# Altium PCB Venato_PCB_v1.PcbDoc (part 1 of 2)
Units mm, origin at the board's own origin, x right, y up, seen from the top; angles counter-clockwise.
Board outline 80 x 50 mm, 2 copper layers (Top Layer, Bottom Layer); 79 components, 70 nets, 349 pads, 0 vias.
Unrouted connection lines stored in the file: 190.
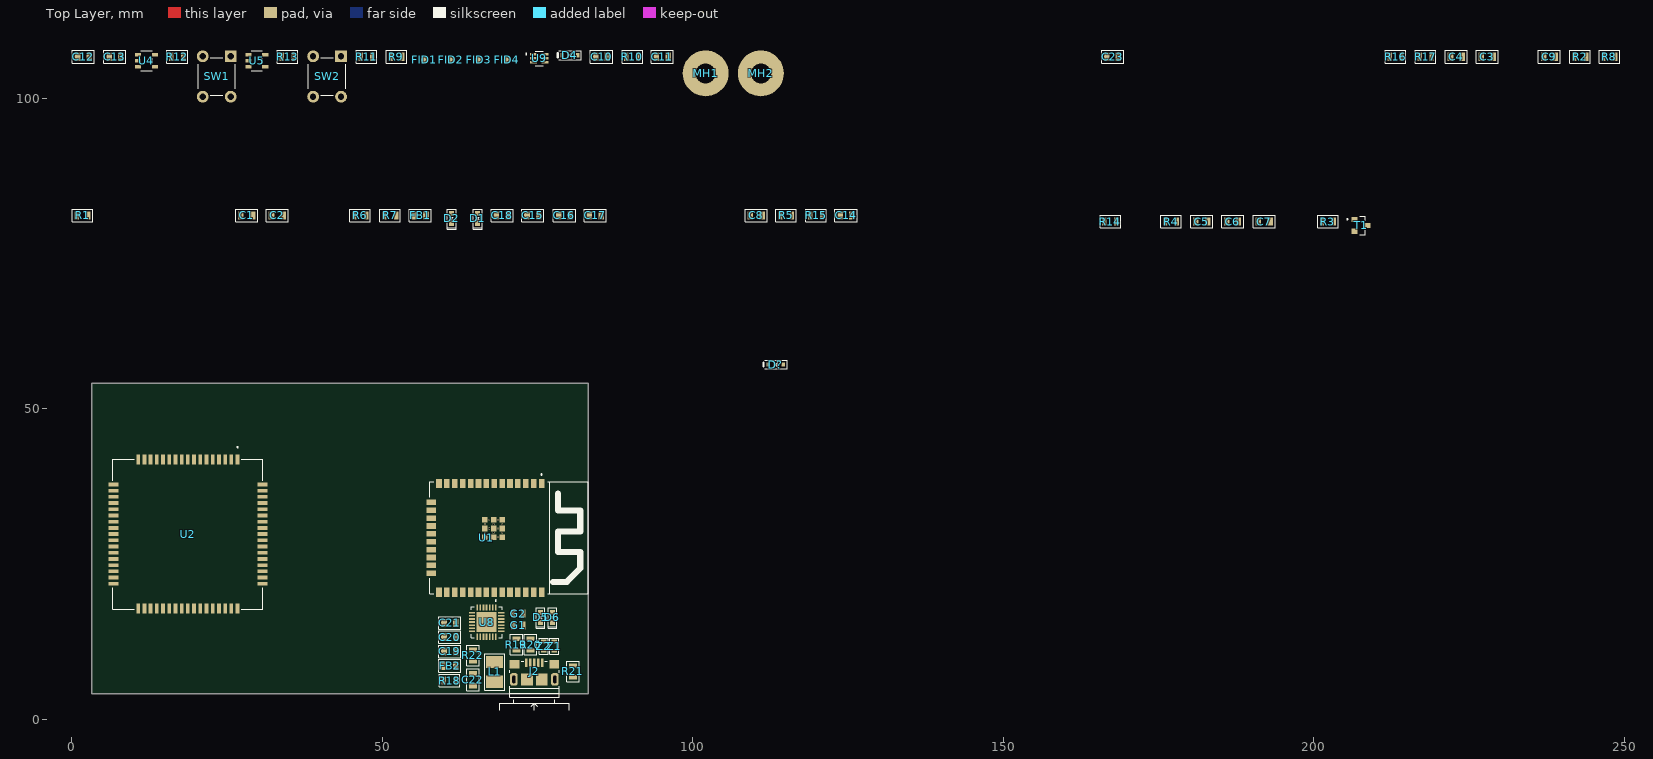
[diagram p0: Top Layer view]
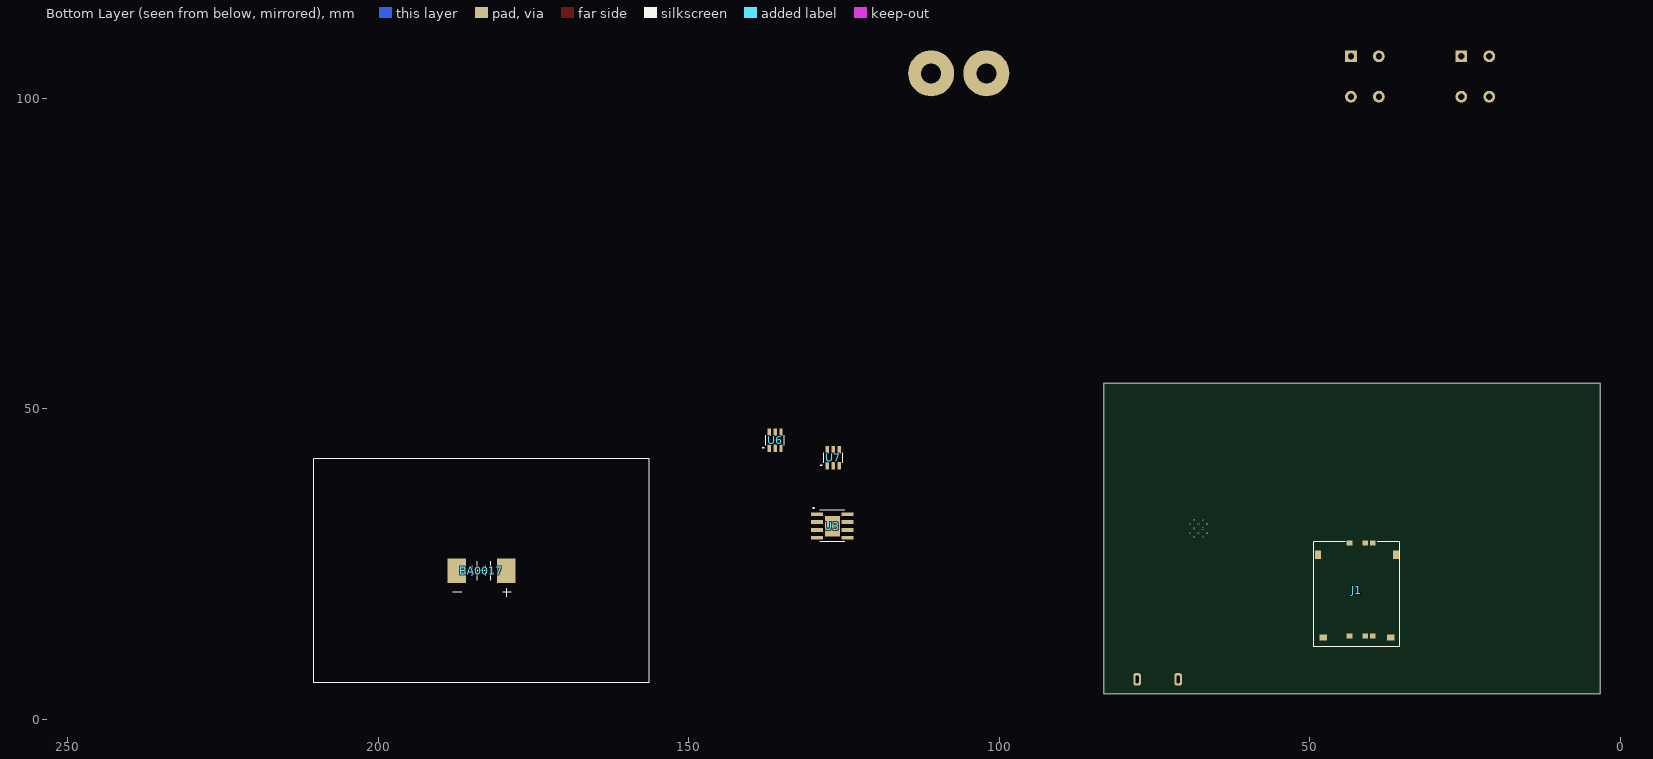
[diagram p1: Bottom Layer view, seen from below]

## Layer stack, top to bottom
Top Solder: solder mask 0.0102, Solder Resist, Dk 3.5
Top Layer: signal copper 0.0356
Dielectric 1: dielectric 0.32, FR-4, Dk 4.8
Bottom Layer: signal copper 0.0356
Bottom Solder: solder mask 0.0102, Solder Resist, Dk 3.5

## Board outline
3.2,4.1 83.2,4.1 83.2,54.1 3.2,54.1

## Design rules (kind name [scope] priority, off if disabled: settings)
Clearance [All] p1: gap=0.254 ignorepadtopadclearanceinfootprint=FALSE except(0: Arc-Hole Track-Hole SMDPad-Hole THPad-Hole Via-Hole Fill-Hole Poly-Hole Region-Hole Text-Hole)
PolygonConnect [All] p1: connectstyle=Relief reliefconductorwidth=0.254 reliefentries=4 polygonreliefangle="90 Angle" airgapwidth=0.254
RoutingVias [All] p1: holewidth=0.711 width=1.27 viastyle="Through Hole" minholewidth=0.711 minwidth=1.27 maxholewidth=0.711 maxwidth=1.27
SolderMaskExpansion [All] p1: expansion=0.102 istentingtop=FALSE
Width [All] p1: maxlimit=0.254 minlimit=0.254 preferedwidth=0.254
30 further rules are at their usual default settings.

## Components (designator, comment, footprint, x,y, rotation, side; value= is the part's Value field where it differs from the comment)
BA0017 "BAT?" Battery 183.4,23.9 r0 bottom
C1 "22uF" C0805 28.167,81.137 r0 top
C2 "100nF" C0805 33.12,81.137 r0 top
C3 "100nF" C0805 227.938,106.668 r0 top
C4 "100nF" C0805 222.985,106.668 r0 top
C5 "100nF" C0805 181.983,80.137 r0 top
C6 "1uF" C0805 186.936,80.137 r0 top
C7 "100uF" C0805 192.016,80.137 r0 top
C8 "1uF" C0805 110.209,81.137 r0 top
C9 "10uF" C0805 237.971,106.668 r0 top
C10 "100nF" C0805 85.317,106.668 r0 top
C11 "100nF" C0805 95.096,106.668 r0 top
C12 "1uF" C0805 1.878,106.668 r0 top
C13 "1uF" C0805 6.958,106.668 r0 top
C14 "100nF" C0805 124.687,81.137 r0 top
C15 "33pF" C0805 74.268,81.137 r0 top
C16 "33pF" C0805 79.348,81.137 r0 top
C17 "33pF" C0805 84.301,81.137 r0 top
C18 "100nF" C0805 69.315,81.137 r0 top
C19 "10uF" C0805 60.9,10.9 r0 top
C20 "100nF" C0805 60.9,13.2 r0 top
C21 "100nF" C0805 60.9,15.5 r0 top
C22 "100uF" C0805 64.6,6.35 r270 top
C23 "100uF" C0805 167.613,106.668 r0 top
D1 "Green" LED0603 65.378,80.629 r90 top
D2 "Orange" LED0603 61.187,80.629 r90 top
D4 "BAT54HT1G" SOD323 80.237,106.922 r0 top
D5 "Orange" LED0603 75.5,16.4 r90 top
D6 "Orange" LED0603 77.4,16.4 r90 top
D? "5.1V" SOD323 113.4,57.1 r0 top
FB1 "MPZ2012S601AT000" C0805 56.107,81.137 r0 top
FB2 "MPZ2012S601AT000" C0805 60.9,8.6 r0 top
FID1 "FID_1MM" FID_x_420 56.742,106.16 r0 top
FID2 "FID_1MM" FID_x_420 61.06,106.16 r0 top
FID3 "FID_1MM" FID_x_420 65.505,106.16 r0 top
FID4 "FID_1MM" FID_x_420 70.077,106.16 r0 top
G1 "0" R0805_no_3d 71.9,15.1 r180 top
G2 "0" R0805_no_3d 71.9,17 r180 top
J1 "78800-0001" SIM 42.4,20.1 r90 bottom
J2 "10118193-0001LF" 10118193-0001LF 74.5,7.738 r0 top
L1 "2U2/2A" CL_inductor 68.1,7.6 r90 top
MH1 "Mounting_hole_17.4_3.2" MH_17.4_3.2 102.081,104.001 r0 top
MH2 "Mounting_hole_17.4_3.2" MH_17.4_3.2 110.971,104.001 r0 top
R1 "10K" R0805 1.751,81.137 r0 top
R2 "10K" R0805 242.924,106.668 r0 top
R3 "4.7K" R0805 202.303,80.137 r0 top
R4 "47K" R0805 177.03,80.137 r0 top
R5 "10K" R0805 115.035,81.137 r0 top
R6 "680" R0805 46.455,81.137 r0 top
R7 "680" R0805 51.281,81.137 r0 top
R8 "1.2k" R0805 247.623,106.668 r0 top
R9 "1K" R0805 52.297,106.668 r0 top
R10 "1K" R0805 90.27,106.668 r0 top
R11 "560" R0805 47.471,106.668 r0 top
R12 "10K" R0805 16.991,106.668 r0 top
R13 "10K" R0805 34.771,106.668 r0 top
R14 "100" R0805 167.251,80.137 r0 top
R15 "1K" R0805 119.861,81.137 r0 top
R16 "560" R0805 213.206,106.668 r0 top
R17 "560" R0805 218.032,106.668 r0 top
R18 "10K" R0805 60.85,6.2 r180 top
R19 "22" R0805 71.6,12 r90 top
R20 "22" R0805 73.9,12 r90 top
R21 "0R" R0805 80.7,7.7 r90 top
R22 "10K" R0805 64.6,10.25 r90 top
SW1 "1825910-6" DIP41825910-6 23.341,103.493 r0 top
SW2 "1825910-6" DIP41825910-6 41.121,103.493 r0 top
T1 "2N7002" TRANS_MMBT2907A 207.637,79.502 r0 top
U1 "ESP32-WROOM-32E-N8" XCVR_ESP32-WROOM-32E_(16MB) 70.4,29.2 r270 top
U2 "SIM808" XCVR_SIM808 18.7,29.8 r270 top
U3 "TP4056" SOP_8 126.9,31.1 r180 bottom
U4 "SN74AHC1G09DBVR" DBV_SOT_5 12.038,106.033 r0 top
U5 "SN74AHC1G09DBVR" DBV_SOT_5 29.818,106.033 r0 top
U6 "DW01A" SOT23-6 136.1,44.9 r180 bottom
U7 "FS8205A" SOT23-6 126.75,42.1 r180 bottom
U8 "CP2102N-A02-GQFN28R" WFQFN-28 66.8,15.64 r270 top
U9 "UMH3NTN" SOT-363 75.284,106.414 r0 top
Z1 "CG0603MLC-05E" R0603 77.7,11.75 r270 top
Z2 "CG0603MLC-05E" R0603 76,11.75 r270 top

## Footprints (in the part's own frame and the unit in brackets; to place one, negate y for a bottom-side part, rotate by r counter-clockwise, add the part's x,y. Pads: shape width x height; smd on the part's side, far side on the other; paste and mask are expansions set on the pad)
10118193-0001LF [mm]
  rect 0.4x1.35 smd mask+0.05: 1(-1.3,1.338) 2(-0.65,1.338) 3(0,1.338) 4(0.65,1.338) 5(1.3,1.338)
  rect 1.6x1.4 smd: 6(-3.2,1.112) 7(3.2,1.112)
  rrect60% 1.2x2 hole 0.5 slot 1.2 at 90 deg mask+0.05: 8(-3.3,-1.338) 9(3.3,-1.338)
  rect 1.9x1.9 smd: 10(-1.2,-1.338) 11(1.2,-1.338)
  silkscreen extent -5.6,-6.3 5.6,1.6, body extent -3.93,-4.2 3.93,1.58, height 2.88
Battery [mm]
  rect 3x4 smd: 1(-4,0) 2(4,0)
  silkscreen extent -27,-18 27,18, body extent -26.6,-29.21 26.5,17.61, height 5.46
C0805 [mm]
  rect 0.9x1.3 smd: 1(-0.95,0) 2(0.95,0)
  silkscreen extent -1.78,-1.02 1.78,1.02, body extent -1.15,-0.51 1.15,0.49, height 1.53
CL_inductor [mm]
  rect 2x2.7 smd: 1(-1.6,0) 2(1.6,0)
  silkscreen extent -2.95,-1.6 2.9,1.6, body extent -1.7,-1.25 1.7,1.25, height 2.7
DBV_SOT_5 [mm]
  rect 1x0.55 smd: 1(-1.35,0.95) 2(-1.35,0) 3(-1.35,-0.95) 4(1.35,-0.95) 5(1.35,0.95)
  silkscreen extent -0.9,-1.6 0.9,1.6, body extent -1.53,-1.53 1.5,1.53, height 1.6
DIP41825910-6 [mm]
  rect 1.9x1.9 hole 1: 1(2.25,3.25)
  round 1.9 hole 1: 2(2.25,-3.25) 3(-2.25,3.25) 4(-2.25,-3.25)
  silkscreen extent -3,-3 3,3, body extent -3,-3.9 3,3.9, height 5
FID_x_420 [mil]
  round 40 smd paste-40 mask+40: 1(0,0)
LED0603 [mm]
  rect 0.8x0.8 smd: 1(-0.8,0) 2(0.8,0)
  silkscreen extent -1.75,-0.7 1.5,0.7, body extent -0.85,-0.4 0.85,0.4, height 0.65
MH_17.4_3.2 [mm]
  round 7.4 hole 3.2: 1(0,0)
R0603 [mm]
  rect 0.6x0.9 smd: 1(-0.75,0) 2(0.75,0)
  silkscreen extent -1.3,-0.7 1.3,0.7, body extent -0.79,-0.42 0.81,0.42, height 0.81
R0805 [mm]
  rect 0.7x1.3 smd: 1(-0.95,0) 2(0.95,0)
  silkscreen extent -1.65,-1.02 1.65,1.02, body extent -1,-0.6 1,0.6, height 0.7
R0805_no_3d [mm]
  rect 0.7x1.3 smd: 1(-0.8,0) 2(0.8,0)
SIM [mm]
  rect 0.8x0.9 smd: 1(-6.71,-2.57) 2(-6.71,-1.33) 3(-6.71,1.21) 5(8.23,-2.57) 6(8.23,-1.33) 7(8.23,1.21)
  rect 0.95x1.2 smd: P1(-6.94,5.425) P2(-6.94,-5.425)
  rect 1.4x0.95 smd: P3(6.37,-6.26) P4(6.37,6.26)
  silkscreen extent -8.48,-6.93 8.48,6.93, body extent -8.38,-6.93 8.58,6.93, height 1.3
SOD323 [mil]
  rect 22x27 smd: 1(-48,0) 2(48,0)
  silkscreen extent -79,-28 71,28, body extent -49,-25 49,25, height 35
SOP_8 [mm]
  rect 1.97x0.6 smd: 1(-2.475,1.905) 2(-2.475,0.635) 3(-2.475,-0.635) 4(-2.475,-1.905) 5(2.475,-1.905) 6(2.475,-0.635) 7(2.475,0.635) 8(2.475,1.905)
  rect 2.413x3.302 smd paste-3: 9(0,0)
  silkscreen extent -3.1,-2.55 2,3, body extent -3.11,-2.5 3.11,2.5, height 1.87
SOT23-6 [mm]
  rect 0.55x1.2 smd: 1(-0.95,-1.3) 2(0,-1.3) 3(0.95,-1.3) 4(0.95,1.3) 5(0,1.3) 6(-0.95,1.3)
  silkscreen extent -2,-1.3 1.5,0.82, body extent -1.45,-1.4 1.45,1.4, height 1.45
SOT-363 [mm]
  rect 1.09x0.4 smd: 1(-0.92,0.65) 2(-0.92,0) 3(-0.92,-0.65) 4(0.92,-0.65) 5(0.92,0) 6(0.92,0.65)
  silkscreen extent -2.2,-1.17 0.68,1.17, body extent -1.05,-1 1.05,1, height 1
TRANS_MMBT2907A [mm]
  rect 1x0.85 smd: 1(-1.05,0.95) 2(-1.05,-0.95) 3(1.05,0)
  silkscreen extent -2.3,-1.46 0.65,1.46, body extent -1.25,-1.05 0.85,1.05
WFQFN-28 [mm]
  rect 0.99x0.27 smd: 1(-2.36,1.5) 2(-2.36,1) 3(-2.36,0.5) 4(-2.36,0) 5(-2.36,-0.5) 6(-2.36,-1) 7(-2.36,-1.5) 15(2.36,-1.5) 16(2.36,-1) 17(2.36,-0.5) 18(2.36,0) 19(2.36,0.5) 20(2.36,1) 21(2.36,1.5)
  rect 0.27x0.99 smd: 8(-1.5,-2.36) 9(-1,-2.36) 10(-0.5,-2.36) 11(0,-2.36) 12(0.5,-2.36) 13(1,-2.36) 14(1.5,-2.36) 22(1.5,2.36) 23(1,2.36) 24(0.5,2.36) 25(0,2.36) 26(-0.5,2.36) 27(-1,2.36) 28(-1.5,2.36)
  rect 3.25x3.25 smd paste-0.597: 29(0,0)
  silkscreen extent -3.55,-2.5 2.5,2.5, body extent -2.51,-2.51 2.51,2.51, height 0.75
XCVR_ESP32-WROOM-32E_(16MB) [mm]
  rect 1.5x0.9 smd: 1(-8.75,5.26) 2(-8.75,3.99) 3(-8.75,2.72) 4(-8.75,1.45) 5(-8.75,0.18) 6(-8.75,-1.09) 7(-8.75,-2.36) 8(-8.75,-3.63) 9(-8.75,-4.9) 10(-8.75,-6.17) 11(-8.75,-7.44) 12(-8.75,-8.71) 13(-8.75,-9.98) 14(-8.75,-11.25) 25(8.75,-11.25) 26(8.75,-9.98) 27(8.75,-8.71) 28(8.75,-7.44) 29(8.75,-6.17) 30(8.75,-4.9) 31(8.75,-3.63) 32(8.75,-2.36) 33(8.75,-1.09) 34(8.75,0.18) 35(8.75,1.45) 36(8.75,2.72) 37(8.75,3.99) 38(8.75,5.26)
  rect 0.9x1.5 smd: 15(-5.715,-12.5) 16(-4.445,-12.5) 17(-3.175,-12.5) 18(-1.905,-12.5) 19(-0.635,-12.5) 20(0.635,-12.5) 21(1.905,-12.5) 22(3.175,-12.5) 23(4.445,-12.5) 24(5.715,-12.5)
  rect 0.9x0.9 smd: 39_1(-2.9,-1.06) 39_2(-1.5,-1.06) 39_3(-0.1,-1.06) 39_4(-2.9,-2.46) 39_5(-1.5,-2.46) 39_6(-0.1,-2.46) 39_7(-2.9,-3.86) 39_8(-1.5,-3.86) 39_9(-0.1,-3.86)
  round 0.3 hole 0.2 mask+0: 39_10(-2.2,-1.06) 39_11(-0.8,-1.06) 39_12(-2.9,-1.76) 39_13(-1.5,-1.76) 39_14(-0.1,-1.76) 39_15(-2.2,-2.46) 39_16(-0.8,-2.46) 39_17(-2.9,-3.16) 39_18(-1.5,-3.16) 39_19(-0.1,-3.16) 39_20(-2.2,-3.86) 39_21(-0.8,-3.86)
  silkscreen extent -10.3,-12.75 9,12.75, body extent -9,-12.75 9,12.75, height 3.25
XCVR_SIM808 [mm]
  rect 1.6x0.6 smd: 1(-12,8) 2(-12,7) 3(-12,6) 4(-12,5) 5(-12,4) 6(-12,3) 7(-12,2) 8(-12,1) 9(-12,0) 10(-12,-1) 11(-12,-2) 12(-12,-3) 13(-12,-4) 14(-12,-5) 15(-12,-6) 16(-12,-7) 17(-12,-8) 35(12,-8) 36(12,-7) 37(12,-6) 38(12,-5) 39(12,-4) 40(12,-3) 41(12,-2) 42(12,-1) 43(12,0) 44(12,1) 45(12,2) 46(12,3) 47(12,4) 48(12,5) 49(12,6) 50(12,7) 51(12,8)
  rect 0.6x1.6 smd: 18(-8,-12) 19(-7,-12) 20(-6,-12) 21(-5,-12) 22(-4,-12) 23(-3,-12) 24(-2,-12) 25(-1,-12) 26(0,-12) 27(1,-12) 28(2,-12) 29(3,-12) 30(4,-12) 31(5,-12) 32(6,-12) 33(7,-12) 34(8,-12) 52(8,12) 53(7,12) 54(6,12) 55(5,12) 56(4,12) 57(3,12) 58(2,12) 59(1,12) 60(0,12) 61(-1,12) 62(-2,12) 63(-3,12) 64(-4,12) 65(-5,12) 66(-6,12) 67(-7,12) 68(-8,12)
  silkscreen extent -14.1,-12.07 12.07,12.07, body extent -12,-12 12,12, height 2.8

## Part data
BA0017: library part BA0017, "3.7V 1200mAh Lipo Battery. Dimension: 40.0±3.0mm x 30.0±2.0mm 8.0±0.5mm (1.575±0.118\" x 1.181±0.079\" x 0.315±0.020\")"
C1: library part CL21A226MAQNNNE, "CAP CER 22UF 25V X5R 0805", Case Code (Imperial)=0805, Case Code (Metric)=2012, Dielectric=X5R, Manufacturer=Samsung, Max Operating Temperature=85°C, Min Operating Temperature=-55°C, Package Quantity=1, Supplier Part Number 1=C45783, Tolerance=20%, Voltage Rating=25V, Capacitance=22uF, Case/Package=0805, Category="Ceramic Capacitors", ComponentLink1Description=https://datasheet.ciiva.com/25724/cl21a226maqnnne-25724468.pdf?src-supplier=Digi-Key, ComponentLink1URL=https://datasheet.ciiva.com/25724/cl21a226maqnnne-25724468.pdf?src-supplier=Digi-Key, Construction=Flat, Contact Plating=Tin, Depth=1.25mm, Length=2mm, Manufacturer Part Number=CL21A226MAQNNNE, Mount="Surface Mount", Packaging="Tape and Reel", Pricing 1="20=0.02360, 200=0.01840, 600=0.01610, 2000=0.01440, 10000=0.01370, 20000=0.01320 (USD)", RoHS=Yes, RoHS Compliant=Yes, Series=CL, Stock 1=1815620, Supplier 1=LCSC, Termination=Wraparound, Thickness=0.055inch, Width=0.049inch
C2 C3 C4 C5 C10 C11 C14 C18 C20 C21: library part CGA4J2X7R1H104K125AM, "Cap Ceramic 0.1uF 50V X7R 10% Pad SMD 0805 125°C Automotive T/R", Case Code (Imperial)=0805, Case Code (Metric)=2012, Dielectric=X7R, Manufacturer=TDK, Max Operating Temperature=125°C, Min Operating Temperature=-55°C, Package Quantity=1, Ratings=AEC-Q200, Resistor Type=Ceramic, Supplier Part Number 1=445-6958-1-ND, Tolerance=10%, Voltage Rating=50V, Capacitance=100nF, Case/Package=0805, Category="Ceramic Capacitors", ComponentLink1Description=http://components.arrow.com/part/dataview/0323_06888403?src-supplier=Arrow+Europe, ComponentLink1URL=http://components.arrow.com/part/dataview/0323_06888403?src-supplier=Arrow+Europe, ComponentLink2Description=https://product.tdk.com/info/en/catalog/datasheets/mlcc_automotive_openmode_en.pdf?src-supplier=Digi-Key, ComponentLink2URL=https://product.tdk.com/info/en/catalog/datasheets/mlcc_automotive_openmode_en.pdf?src-supplier=Digi-Key, ComponentLink3Description=https://product.tdk.com/info/en/documents/chara_sheet/CGA4J2X7R1H104K125AM.pdf?src-supplier=Digi-Key, ComponentLink3URL=https://product.tdk.com/info/en/documents/chara_sheet/CGA4J2X7R1H104K125AM.pdf?src-supplier=Digi-Key, ComponentLink4Description=http://components.arrow.com/part/dataview/57437351S460182N1165?src-supplier=Arrow+Electronics, ComponentLink4URL=http://components.arrow.com/part/dataview/57437351S460182N1165?src-supplier=Arrow+Electronics, Depth=1.25mm, Features="Soft Termination", Height=1.25mm, Length=0.079inch, Manufacturer Part Number=CGA4J2X7R1H104K125AM, Mount="Surface Mount", Packaging="Tape and Reel", Pricing 1="1=0.20000, 10=0.14200, 50=0.08080, 100=0.06700, 500=0.04696, 1000=0.03888 (USD)", RoHS=Yes, RoHS Compliant=Yes, Series=CGA, Stock 1=4940, Supplier 1=Digi-Key, Termination=SMD/SMT, Thickness=0.057inch, Voltage Rating (DC)=50V, Weight=0.000194oz, Width=0.049inch
C6: library part GRM21BR71H105KA12L, "0805 1 uF 50 V ±10% Tolerance X7R Multilayer Ceramic Chip Capacitor", Case Code (Imperial)=0805, Case Code (Metric)=2012, Dielectric=X7R, Manufacturer=Murata, Max Operating Temperature=125°C, Min Operating Temperature=-55°C, Package Quantity=1, Tolerance=10%, Voltage=50V, Capacitance=1uF, Case/Package=0805, Category="Ceramic Capacitors", ComponentLink1Description=https://datasheet.ciiva.com/22774/1747475-22774409.pdf?src-supplier=Farnell, ComponentLink1URL=https://datasheet.ciiva.com/22774/1747475-22774409.pdf?src-supplier=Farnell, ComponentLink2Description=https://datasheet.ciiva.com/28659/1684872-28659460.pdf?src-supplier=Element14, ComponentLink2URL=https://datasheet.ciiva.com/28659/1684872-28659460.pdf?src-supplier=Element14, ComponentLink3Description=https://datasheet.ciiva.com/139/grm21br71h105ka12-139467.pdf?src-supplier=Digi-Key, ComponentLink3URL=https://datasheet.ciiva.com/139/grm21br71h105ka12-139467.pdf?src-supplier=Digi-Key, ComponentLink4Description=https://datasheet.ciiva.com/3777/8166grm21br71h105ka1223-3777308.pdf?src-supplier=Arrow+Electronics, ComponentLink4URL=https://datasheet.ciiva.com/3777/8166grm21br71h105ka1223-3777308.pdf?src-supplier=Arrow+Electronics, ComponentLink5Description=https://datasheet.ciiva.com/29202/450841-da-01-de-vs-chip-kond-0805-1-0-uf-10pr-50-0v-x7r-29202833.pdf?src-supplier=Conrad, ComponentLink5URL=https://datasheet.ciiva.com/29202/450841-da-01-de-vs-chip-kond-0805-1-0-uf-10pr-50-0v-x7r-29202833.pdf?src-supplier=Conrad, ComponentLink6Description=https://datasheet.ciiva.com/29199/454791-da-01-en-vs-kondensator-0805-29199539.pdf?src-supplier=Conrad, ComponentLink6URL=https://datasheet.ciiva.com/29199/454791-da-01-en-vs-kondensator-0805-29199539.pdf?src-supplier=Conrad, ComponentLink7Description=https://datasheet.ciiva.com/22774/608985-22774412.pdf?src-supplier=Farnell, ComponentLink7URL=https://datasheet.ciiva.com/22774/608985-22774412.pdf?src-supplier=Farnell, ComponentLink8Description=https://datasheet.ciiva.com/22774/608985-22774411.pdf?src-supplier=Farnell, ComponentLink8URL=https://datasheet.ciiva.com/22774/608985-22774411.pdf?src-supplier=Farnell, ComponentLink9Description=https://datasheet.ciiva.com/16199/product-16199127.pdf?src-supplier=Future+Electronics, ComponentLink9URL=https://datasheet.ciiva.com/16199/product-16199127.pdf?src-supplier=Future+Electronics, Construction=Flat, Depth=1.25mm, Height=1.25mm, Lead Free="Lead Free", Length=2mm, Manufacturer Part Number=GRM21BR71H105KA12L, Material=Ceramic, Mount="Surface Mount", Number of Pins=2, Packaging="Tape and Reel", Pricing 1="1=0.72300, 25=0.64900, 50=0.59100, 100=0.52300, 250=0.46500, 500=0.39900, 1000=0.35100, 2500=0.27800, 3000=0.27800 (USD)", Radiation Hardening=No, Reach SVHC Compliant=Yes, RoHS=Yes, RoHS Compliant=Yes, Series=GRM, Supplier 1=Newark, Termination=SMD/SMT, Thickness=0.053inch, Voltage Rating=50V, Voltage Rating (DC)=50V, Width=0.049inch
C7 C22 C23: library part GRM21BR60J107ME15L, "0805 100 uF 6.3 V ±20% Tolerance X5R Multilayer Ceramic Chip Capacitor", Case Code (Imperial)=0805, Case Code (Metric)=2012, Dielectric=X5R, Manufacturer=Murata, Max Operating Temperature=85°C, Min Operating Temperature=-55°C, Supplier Part Number 1=490-13981-1-ND, Tolerance=20%, Voltage Rating=6.3V, Capacitance=100uF, Case/Package=0805, Category="Ceramic Capacitors", ComponentLink1Description=http://www.farnell.com/datasheets/1957830.pdf?src-supplier=Farnell, ComponentLink1URL=http://www.farnell.com/datasheets/1957830.pdf?src-supplier=Farnell, ComponentLink2Description=http://www.farnell.com/datasheets/1957830.pdf?src-supplier=Element14, ComponentLink2URL=http://www.farnell.com/datasheets/1957830.pdf?src-supplier=Element14, ComponentLink3Description=https://search.murata.co.jp/Ceramy/image/img/A01X/G101/ENG/GRM21BR60J107ME15-01.pdf?src-supplier=Digi-Key, ComponentLink3URL=https://search.murata.co.jp/Ceramy/image/img/A01X/G101/ENG/GRM21BR60J107ME15-01.pdf?src-supplier=Digi-Key, ComponentLink4Description=http://www.farnell.com/datasheets/1957830.pdf?src-supplier=Newark, ComponentLink4URL=http://www.farnell.com/datasheets/1957830.pdf?src-supplier=Newark, Lead Free="Lead Free", Length=0.079inch, Manufacturer Part Number=GRM21BR60J107ME15L, Mount="Surface Mount", Packaging="Cut Tape", Pricing 1="1=1.15000, 10=0.90900, 50=0.78800, 100=0.68180, 500=0.51516, 1000=0.45456 (USD)", Reach SVHC Compliant=Yes, RoHS=Yes, RoHS Compliant=Yes, Series=GRM, Stock 1=830718, Supplier 1=Digi-Key, Thickness=0.057inch, Voltage Rating (DC)=6.3V, Width=0.049inch
C8 C12 C13: library part C2012X5R1E105K125AA, "TDK - C2012X5R1E105K125AA - SMD Multilayer Ceramic Capacitor, 1 µF, 25 V, 0805 [2012 Metric], ± 10%, X5R, C Series", Case Code (Imperial)=0805, Case Code (Metric)=2012, Dielectric=X5R, Dielectric Material=Ceramic, Manufacturer=TDK, Max Operating Temperature=85°C, Min Operating Temperature=-55°C, Package Quantity=2000, Supplier Part Number 1=445-1419-1-ND, Tolerance=10%, Voltage=25V, Capacitance=1uF, Case/Package=0805, Category="Ceramic Capacitors", ComponentLink1Description=https://datasheet.ciiva.com/11787/0900766b80c1bb00-11787608.pdf?src-supplier=RSComponents, ComponentLink1URL=https://datasheet.ciiva.com/11787/0900766b80c1bb00-11787608.pdf?src-supplier=RSComponents, ComponentLink2Description=https://datasheet.ciiva.com/16449/e412-c-16449595.pdf?src-supplier=Future+Electronics, ComponentLink2URL=https://datasheet.ciiva.com/16449/e412-c-16449595.pdf?src-supplier=Future+Electronics, ComponentLink3Description=https://datasheet.ciiva.com/28602/1744655-28602171.pdf?src-supplier=Element14, ComponentLink3URL=https://datasheet.ciiva.com/28602/1744655-28602171.pdf?src-supplier=Element14, ComponentLink4Description=https://datasheet.ciiva.com/15192/getdatasheetpartid-726707-15192140.pdf?src-supplier=Verical, ComponentLink4URL=https://datasheet.ciiva.com/15192/getdatasheetpartid-726707-15192140.pdf?src-supplier=Verical, Construction=Flat, Depth=1.25mm, Height=1.25mm, Lead Free="Lead Free", Length=2mm, Manufacturer Part Number=C2012X5R1E105K125AA, Mount="Surface Mount", Number of Pins=2, Packaging="Tape and Reel", Pricing 1="1=0.23000, 10=0.15800, 50=0.09500, 100=0.08030, 500=0.05492, 1000=0.04858 (USD)", Radiation Hardening=No, REACH SVHC="No SVHC", Resistor Type=Ceramic, RoHS=Yes, RoHS Compliant=Yes, Series=C, Stock 1=32247, Supplier 1=Digi-Key, Termination=SMD/SMT, Thickness=0.057inch, Voltage Rating=25V, Voltage Rating (DC)=25V, Weight=0.000194oz, Width=0.049inch
C9 C19: library part CGA4J3X7S1A106M125AB, "Cap Ceramic 10uF 10V X7S 20% Pad SMD 0805 125°C Low ESR Automotive T/R", Case Code (Imperial)=0805, Case Code (Metric)=2012, Dielectric=X7S, Manufacturer=TDK, Max Operating Temperature=125°C, Min Operating Temperature=-55°C, Package Quantity=2000, Ratings=AEC-Q200, Supplier Part Number 1=445-16115-1-ND, Tolerance=20%, Voltage Rating=10V, Capacitance=10uF, Case/Package=0805, Category="Ceramic Capacitors", ComponentLink1Description=http://www.mouser.com/ds/2/400/lcc_automotive_general_en-843974.pdf?src-supplier=Mouser, ComponentLink1URL=http://www.mouser.com/ds/2/400/lcc_automotive_general_en-843974.pdf?src-supplier=Mouser, ComponentLink2Description=https://product.tdk.com/info/en/documents/chara_sheet/CGA4J3X7S1A106M125AB.pdf?src-supplier=Digi-Key, ComponentLink2URL=https://product.tdk.com/info/en/documents/chara_sheet/CGA4J3X7S1A106M125AB.pdf?src-supplier=Digi-Key, Height=1.25mm, Length=0.079inch, Manufacturer Part Number=CGA4J3X7S1A106M125AB, Mount="Surface Mount", Packaging="Tape and Reel", RoHS=Yes, RoHS Compliant=Yes, Supplier 1=Digi-Key, Termination=SMD/SMT, Thickness=0.057inch, Voltage Rating (DC)=10V, Weight=0.000194oz, Width=1.25mm
  C9: Pricing 1="1=0.41000, 10=0.29000, 50=0.21920, 100=0.19090, 500=0.14140, 1000=0.12019 (USD)", Stock 1=13960
  C19: Pricing 1="1=0.45000, 10=0.31600, 50=0.23880, 100=0.20790, 500=0.15400, 1000=0.13090 (USD)", Stock 1=10
C15 C16 C17: library part CC0805JRNPO9BN330, "Cap Ceramic 33pF 50V C0G 5% SMD 0805 125C T/R", Case Code (Imperial)=0805, Case Code (Metric)=2012, Dielectric=C0G, Dielectric Material=Ceramic, Manufacturer=Yageo, Max Operating Temperature=125°C, Min Operating Temperature=-55°C, Package Quantity=1, Supplier Part Number 1=311-1105-1-ND, Tolerance=5%, Voltage=50V, Capacitance=33pF, Case/Package=0805, Category="Ceramic Capacitors", ComponentLink1Description=https://datasheet.ciiva.com/8033/1443161-8033944.pdf?src-supplier=Element14, ComponentLink1URL=https://datasheet.ciiva.com/8033/1443161-8033944.pdf?src-supplier=Element14, ComponentLink2Description=https://datasheet.ciiva.com/8033/1443161-8033942.pdf?src-supplier=Element14, ComponentLink2URL=https://datasheet.ciiva.com/8033/1443161-8033942.pdf?src-supplier=Element14, ComponentLink3Description=https://datasheet.ciiva.com/144/mlccorderingcode-144779.pdf?src-supplier=Digi-Key, ComponentLink3URL=https://datasheet.ciiva.com/144/mlccorderingcode-144779.pdf?src-supplier=Digi-Key, ComponentLink4Description=https://datasheet.ciiva.com/144/mlccorderingcode-144778.pdf?src-supplier=Digi-Key, ComponentLink4URL=https://datasheet.ciiva.com/144/mlccorderingcode-144778.pdf?src-supplier=Digi-Key, ComponentLink5Description=https://datasheet.ciiva.com/144/mlccorderingcode-144780.pdf?src-supplier=Digi-Key, ComponentLink5URL=https://datasheet.ciiva.com/144/mlccorderingcode-144780.pdf?src-supplier=Digi-Key, ComponentLink6Description=https://datasheet.ciiva.com/11464/upy-gp-np0-16v-to-50v-8-11464747.pdf?src-supplier=Avnet, ComponentLink6URL=https://datasheet.ciiva.com/11464/upy-gp-np0-16v-to-50v-8-11464747.pdf?src-supplier=Avnet, ComponentLink7Description=https://datasheet.ciiva.com/29241/445349-da-01-en-kerko-chip-0805-np0-33pf-5proz-50v-g-29241975.pdf?src-supplier=Conrad, ComponentLink7URL=https://datasheet.ciiva.com/29241/445349-da-01-en-kerko-chip-0805-np0-33pf-5proz-50v-g-29241975.pdf?src-supplier=Conrad, Depth=1.25mm, Height=0.6mm, Lead Free="Lead Free", Length=2mm, Manufacturer Part Number=CC0805JRNPO9BN330, Material=Ceramic, Mount="Surface Mount", Packaging="Tape and Reel", Pricing 1="1=0.10000, 10=0.06900, 50=0.03760, 100=0.03060, 500=0.02188, 1000=0.01719 (USD)", Radiation Hardening=No, Resistor Type=Ceramic, RoHS=Yes, RoHS Compliant=Yes, Series=CC, Stock 1=150073, Supplier 1=Digi-Key, Termination=SMD/SMT, Thickness=0.024inch, Voltage Rating=50V, Voltage Rating (DC)=50V, Width=0.049inch
D1: library part LGL29K-G2J1-24-Z, "LED Single Chip Green 570nm 20mA 2-Pin 0603 T/R", Case Code (Imperial)=0603, Case Code (Metric)=1608, Forward Current=20mA, Forward Voltage=2.2V, Lens Color=White, Manufacturer="Osram Opto", Max Operating Temperature=100°C, Min Operating Temperature=-40°C, Package Quantity=5000, Reverse Voltage=12V, Supplier Part Number 1=LGL29K-G2J1-24-Z-299157-OSRAMOPTO, Test Current=2mA, Case/Package=0603, Category=LEDs, Color=Green, ComponentLink1Description=https://datasheet.ciiva.com/4689/g-l29k-39844-4689584.pdf?src-supplier=Mouser, ComponentLink1URL=https://datasheet.ciiva.com/4689/g-l29k-39844-4689584.pdf?src-supplier=Mouser, ComponentLink2Description=https://datasheet.ciiva.com/15198/getdatasheetpartid-571127-15198411.pdf?src-supplier=Verical, ComponentLink2URL=https://datasheet.ciiva.com/15198/getdatasheetpartid-571127-15198411.pdf?src-supplier=Verical, ComponentLink3Description=https://datasheet.ciiva.com/2112/00077107-0-2112887.pdf?src-supplier=Digi-Key, ComponentLink3URL=https://datasheet.ciiva.com/2112/00077107-0-2112887.pdf?src-supplier=Digi-Key, ComponentLink4Description=https://datasheet.ciiva.com/2112/00077107-0-2112886.pdf?src-supplier=Digi-Key, ComponentLink4URL=https://datasheet.ciiva.com/2112/00077107-0-2112886.pdf?src-supplier=Digi-Key, ComponentLink5Description=https://datasheet.ciiva.com/2112/00077107-0-2112888.pdf?src-supplier=Digi-Key, ComponentLink5URL=https://datasheet.ciiva.com/2112/00077107-0-2112888.pdf?src-supplier=Digi-Key, Depth=0.8mm, Dominant Wavelength=570nm, Height=0.65mm, Illumination Color=Green, Length=1.3mm, Lens Size=0.8mm, Lens Style=Flat,Diffused,Colorless,Rectangular, Lens Transparency=Diffused, Luminous Flux=0.012lm, Luminous Intensity=5.6mcd, Manufacturer Part Number=LGL29K-G2J1-24-Z, Mount="Surface Mount", Number of Elements=1, Number of LEDs=1, Number of Pins=2, Packaging="Tape and Reel", Radiation Hardening=No, RoHS=Yes, RoHS Compliant=Yes, Series=SmartLED, Stock 1=60000, Supplier 1="Bison Technologies", Viewing Angle=160°, Width=0.8mm
D2 D5 D6: library part LOL29K-H2K1-24-Z, "Smartled Orange Lc", Case Code (Imperial)=0603, Case Code (Metric)=1608, Forward Current=20mA, Forward Voltage=2.2V, Lens Color=White, Manufacturer="Osram Opto", Max Operating Temperature=100°C, Min Operating Temperature=-40°C, Package Quantity=5000, Reverse Voltage=12V, Supplier Part Number 1="LO L29K-H2K1-24-Z", Test Current=2mA, Case/Package=0603, Category=Uncategorized, Color=Orange, ComponentLink1Description=https://datasheet.ciiva.com/2112/00077105-0-2112905.pdf?src-supplier=Digi-Key, ComponentLink1URL=https://datasheet.ciiva.com/2112/00077105-0-2112905.pdf?src-supplier=Digi-Key, ComponentLink2Description=https://datasheet.ciiva.com/2112/00077105-0-2112904.pdf?src-supplier=Digi-Key, ComponentLink2URL=https://datasheet.ciiva.com/2112/00077105-0-2112904.pdf?src-supplier=Digi-Key, ComponentLink3Description=https://datasheet.ciiva.com/2112/00077105-0-2112906.pdf?src-supplier=Digi-Key, ComponentLink3URL=https://datasheet.ciiva.com/2112/00077105-0-2112906.pdf?src-supplier=Digi-Key, ComponentLink4Description=https://datasheet.ciiva.com/15198/getdatasheetpartid-693885-15198412.pdf?src-supplier=Verical, ComponentLink4URL=https://datasheet.ciiva.com/15198/getdatasheetpartid-693885-15198412.pdf?src-supplier=Verical, Depth=0.8mm, Dominant Wavelength=606nm, Height=0.65mm, Illumination Color=Orange, Length=1.3mm, Lens Size=0.8mm, Lens Style=Flat,Diffused,Colorless,Rectangular, Lens Transparency=Diffused, Luminous Flux=0.025lm, Luminous Intensity=9mcd, Manufacturer Part Number=LOL29K-H2K1-24-Z, Mount="Surface Mount", Number of Elements=1, Number of LEDs=1, Number of Pins=2, Packaging="Tape and Reel", Radiation Hardening=No, RoHS=Yes, RoHS Compliant=Yes, Series=SmartLED, Supplier 1="Arrow Electronics", Viewing Angle=160°, Width=0.8mm
D4: "Small Signal Schottky Diode, Single, 30 V, 200 Ma, 800 Mv, 600 Ma, 150 C", Average Rectified Current=200mA, Capacitance=10pF, Forward Voltage=800mV, Manufacturer="ON Semiconductor / Fairchild", Max Forward Surge Current (Ifsm)=600mA, Max Operating Temperature=150°C, Max Repetitive Reverse Voltage (Vrrm)=30V, Max Reverse Current=2uA, Min Operating Temperature=-55°C, Package Quantity=3000, Power Dissipation=200mW, Supplier Part Number 1=BAT54HT1GOSDKR-ND, Category="Schottky Diodes", ComponentLink1Description=https://datasheet.ciiva.com/4714/bat54ht1-d-72881-4714706.pdf?src-supplier=Mouser, ComponentLink1URL=https://datasheet.ciiva.com/4714/bat54ht1-d-72881-4714706.pdf?src-supplier=Mouser, ComponentLink2Description=https://datasheet.ciiva.com/4452/bat54ht1g-104602-4452889.pdf?src-supplier=Mouser, ComponentLink2URL=https://datasheet.ciiva.com/4452/bat54ht1g-104602-4452889.pdf?src-supplier=Mouser, ComponentLink3Description=https://datasheet.ciiva.com/30479/0900766b811a63a9-30479442.pdf?src-supplier=RSComponents, ComponentLink3URL=https://datasheet.ciiva.com/30479/0900766b811a63a9-30479442.pdf?src-supplier=RSComponents, ComponentLink4Description=https://datasheet.ciiva.com/34301/806549-34301562.pdf?src-supplier=Jameco, ComponentLink4URL=https://datasheet.ciiva.com/34301/806549-34301562.pdf?src-supplier=Jameco, ComponentLink5Description=https://datasheet.ciiva.com/1240/1747983-1240762.pdf?src-supplier=Newark, ComponentLink5URL=https://datasheet.ciiva.com/1240/1747983-1240762.pdf?src-supplier=Newark, ComponentLink6Description=https://datasheet.ciiva.com/915/bat54ht1-d-915445.pdf?src-supplier=Digi-Key, ComponentLink6URL=https://datasheet.ciiva.com/915/bat54ht1-d-915445.pdf?src-supplier=Digi-Key, ComponentLink7Description=https://datasheet.ciiva.com/915/bat54ht1-d-915444.pdf?src-supplier=Digi-Key, ComponentLink7URL=https://datasheet.ciiva.com/915/bat54ht1-d-915444.pdf?src-supplier=Digi-Key, ComponentLink8Description=https://datasheet.ciiva.com/910/bat54ht1g-910499.pdf?src-supplier=Digi-Key, ComponentLink8URL=https://datasheet.ciiva.com/910/bat54ht1g-910499.pdf?src-supplier=Digi-Key, ComponentLink9Description=https://datasheet.ciiva.com/910/bat54ht1g-910498.pdf?src-supplier=Digi-Key, ComponentLink9URL=https://datasheet.ciiva.com/910/bat54ht1g-910498.pdf?src-supplier=Digi-Key, ComponentLink10Description=https://datasheet.ciiva.com/8294/bat54ht1-d-8294645.pdf?src-supplier=Avnet, ComponentLink10URL=https://datasheet.ciiva.com/8294/bat54ht1-d-8294645.pdf?src-supplier=Avnet, ComponentLink11Description=https://datasheet.ciiva.com/910/bat54ht1g-910497.pdf?src-supplier=Digi-Key, ComponentLink11URL=https://datasheet.ciiva.com/910/bat54ht1g-910497.pdf?src-supplier=Digi-Key, ComponentLink12Description=https://datasheet.ciiva.com/8303/bat54ht1g-8303645.pdf?src-supplier=Avnet, ComponentLink12URL=https://datasheet.ciiva.com/8303/bat54ht1g-8303645.pdf?src-supplier=Avnet, ComponentLink13Description=https://datasheet.ciiva.com/915/bat54ht1-d-915443.pdf?src-supplier=Digi-Key, ComponentLink13URL=https://datasheet.ciiva.com/915/bat54ht1-d-915443.pdf?src-supplier=Digi-Key, ComponentLink14Description=https://datasheet.ciiva.com/46429/1727620-46429206.pdf?src-supplier=Element14, ComponentLink14URL=https://datasheet.ciiva.com/46429/1727620-46429206.pdf?src-supplier=Element14, ComponentLink15Description=https://datasheet.ciiva.com/1180/bat54ht1-d-1180252.pdf?src-supplier=Element14, ComponentLink15URL=https://datasheet.ciiva.com/1180/bat54ht1-d-1180252.pdf?src-supplier=Element14, ComponentLink16Description=https://datasheet.ciiva.com/1180/bat54ht1-d-1180251.pdf?src-supplier=Element14, ComponentLink16URL=https://datasheet.ciiva.com/1180/bat54ht1-d-1180251.pdf?src-supplier=Element14, ComponentLink17Description=https://datasheet.ciiva.com/17020/bat54ht1g-17020445.pdf?src-supplier=Future+Electronics, ComponentLink17URL=https://datasheet.ciiva.com/17020/bat54ht1g-17020445.pdf?src-supplier=Future+Electronics, ComponentLink18Description=https://datasheet.ciiva.com/48686/001262925-da-01-en-diode-schottky-30v-bat54ht1g-sod-323-fsc-48686266.pdf?src-supplier=Conrad, ComponentLink18URL=https://datasheet.ciiva.com/48686/001262925-da-01-en-diode-schottky-30v-bat54ht1g-sod-323-fsc-48686266.pdf?src-supplier=Conrad, Contact Plating=Tin,Matte, Current Rating=200mA, Element Configuration=Single, Forward Current=200mA, Height=1mm, Lead Free="Lead Free", Length=1.8mm, Manufacturer Part Number=BAT54HT1G, Max Reverse Leakage Current=2uA, Max Reverse Voltage (DC)=30V, Max Surge Current=600mA, Mount="Surface Mount", Number of Pins=2, Output Current=200mA, Packaging="Tape and Reel", Peak Non-Repetitive Surge Current=600mA, Polarity=Standard, Pricing 1="1=0.24000, 10=0.19900, 100=0.10570, 500=0.06956, 1000=0.04730 (USD)", Radiation Hardening=No, REACH SVHC="No SVHC", Recovery Time=5ns, Reverse Recovery Time=5ns, Reverse Voltage=30V, RoHS=Yes, RoHS Compliant=Yes, Supplier 1=Digi-Key, Voltage Rating (DC)=30V, Width=1.35mm
D?: library part BZT52C5V1S, "Zener Single Diode, 5.1 V, 200 Mw, Sod-323, 6 %, 2, 150 C Rohs Compliant: Yes", Forward Voltage=900mV, Manufacturer=Multicomp, Max Forward Surge Current (Ifsm)=2A, Max Operating Temperature=150°C, Max Power Dissipation=200mW, Min Operating Temperature=-65°C, Supplier Part Number 1=1466019, Test Current=5mA, Category="Zener Diodes", ComponentLink1Description=http://www.farnell.com/datasheets/469132.pdf?src-supplier=Farnell, ComponentLink1URL=http://www.farnell.com/datasheets/469132.pdf?src-supplier=Farnell, ComponentLink2Description=http://www.farnell.com/datasheets/469132.pdf?src-supplier=Element14, ComponentLink2URL=http://www.farnell.com/datasheets/469132.pdf?src-supplier=Element14, Manufacturer Part Number=BZT52C5V1S, Mount="Surface Mount", Number of Pins=2, Packaging="Cut Tape", Reach SVHC Compliant=Yes, RoHS=Yes, Supplier 1=Farnell, Termination=SMD/SMT, Zener Voltage=5.1V
FB1 FB2: "Ferrite Beads Multi-Layer Power 600Ohm 25% 100MHz 2A 100mOhm DCR 0805 T/R", Case Code (Imperial)=0805, Case Code (Metric)=2012, Current Rating=2A, DC Resistance (DCR)=100mR, Manufacturer=TDK, Package Quantity=1, Supplier Part Number 1=445-2206-6-ND, Case/Package=0805, Category="Ferrite Beads and Chips", ComponentLink1Description=https://datasheet.ciiva.com/46634/beads-commercial-power-mpz-en-46634377.pdf?src-supplier=Digi-Key, ComponentLink1URL=https://datasheet.ciiva.com/46634/beads-commercial-power-mpz-en-46634377.pdf?src-supplier=Digi-Key, ComponentLink2Description=https://datasheet.ciiva.com/46634/beads-commercial-power-mpz-en-46634606.pdf?src-supplier=Digi-Key, ComponentLink2URL=https://datasheet.ciiva.com/46634/beads-commercial-power-mpz-en-46634606.pdf?src-supplier=Digi-Key, ComponentLink3Description=https://datasheet.ciiva.com/46634/beads-commercial-power-mpz-en-46634335.pdf?src-supplier=Digi-Key, ComponentLink3URL=https://datasheet.ciiva.com/46634/beads-commercial-power-mpz-en-46634335.pdf?src-supplier=Digi-Key, Height=0.041inch, Impedance=600R, Lead Free="Lead Free", Length=0.079inch, Manufacturer Part Number=MPZ2012S601AT000, Max DC Current=2A, Mount="Surface Mount", Packaging="Tape and Reel", Pricing 1="1=0.12000, 10=0.10100, 25=0.09040, 50=0.06640, 100=0.05740, 250=0.04528, 500=0.03824, 1000=0.03221 (USD)", REACH SVHC="No SVHC", RoHS=Yes, RoHS Compliant=Yes, Series=MPZ, Supplier 1=Digi-Key, Width=0.049inch
FID1 FID2 FID3 FID4: "Fisushal 1MM"
G1 G2: library part "0Ohm gap", "This is a gap that diconects line. you can connect it using soldier"
J1: "Vertical Surface Mount Memory & SIM Card Connector; with SMT Termination", Current Rating=500mA, Manufacturer=Molex, Max Operating Temperature=85°C, Min Operating Temperature=-30°C, Package Quantity=1200, Voltage Rating (DC)=5V, Category="Memory Connectors", ComponentLink1Description=https://datasheet.ciiva.com/28461/1769838-28461586.pdf?src-supplier=Element14, ComponentLink1URL=https://datasheet.ciiva.com/28461/1769838-28461586.pdf?src-supplier=Element14, ComponentLink2Description=https://datasheet.ciiva.com/30490/0900766b812787b6-30490685.pdf?src-supplier=RSComponents, ComponentLink2URL=https://datasheet.ciiva.com/30490/0900766b812787b6-30490685.pdf?src-supplier=RSComponents, ComponentLink3Description=https://datasheet.ciiva.com/23829/0788000001-memory-card-socket-23829351.pdf?src-supplier=Newark, ComponentLink3URL=https://datasheet.ciiva.com/23829/0788000001-memory-card-socket-23829351.pdf?src-supplier=Newark, ComponentLink4Description=https://datasheet.ciiva.com/24089/0788000001-memory-card-socket-253493-24089694.pdf?src-supplier=Mouser, ComponentLink4URL=https://datasheet.ciiva.com/24089/0788000001-memory-card-socket-253493-24089694.pdf?src-supplier=Mouser, ComponentLink5Description=https://datasheet.ciiva.com/28461/1769838-28461580.pdf?src-supplier=Element14, ComponentLink5URL=https://datasheet.ciiva.com/28461/1769838-28461580.pdf?src-supplier=Element14, Connector Type=Socket, Contact Material=Bronze, Contact Plating=Gold, ELV=Compliant, Gender=Female, Halogen Free="Low Halogen", Height=1.4mm, Housing Material=Polymer, Length=16.96mm, Manufacturer Part Number=78800-0001, Material=Bronze, Mount="Surface Mount", Number of Circuits=6, Number of Contacts=6, Number of Rows=1, Orientation=Vertical, Packaging="Tape and Reel", Pitch=1.4mm, Pricing 1="5=1.42600, 25=1.35800, 50=1.28600, 125=1.18000, 250=1.07600 (GBP)", RoHS=Yes, RoHS Compliant=Yes, Series=78800, Shielding=Shielded, Stock 1=1295, Supplier 1=RSComponents, Termination=SMD/SMT
J2: "FCI Right Angle Surface Mount Mount Female USB Connector; 100 V ac; 1.8A", Manufacturer="Amphenol ICC / FCI", Supplier Part Number 1=609-4616-1-ND, Category="USB Connectors", ComponentLink1Description=http://components.arrow.com/part/dataview/0323_04107372?src-supplier=Arrow+Europe, ComponentLink1URL=http://components.arrow.com/part/dataview/0323_04107372?src-supplier=Arrow+Europe, ComponentLink2Description=http://uk.rs-online.com/webdocs/1450/0900766b814507f1.pdf?src-supplier=RSComponents, ComponentLink2URL=http://uk.rs-online.com/webdocs/1450/0900766b814507f1.pdf?src-supplier=RSComponents, ComponentLink3Description=https://cdn.amphenol-icc.com/media/wysiwyg/files/documentation/datasheet/inputoutput/io_usb_micro.pdf?src-supplier=Avnet, ComponentLink3URL=https://cdn.amphenol-icc.com/media/wysiwyg/files/documentation/datasheet/inputoutput/io_usb_micro.pdf?src-supplier=Avnet, ComponentLink4Description=https://cdn.amphenol-icc.com/media/wysiwyg/files/documentation/datasheet/inputoutput/io_usb_micro.pdf?src-supplier=Arrow+Electronics, ComponentLink4URL=https://cdn.amphenol-icc.com/media/wysiwyg/files/documentation/datasheet/inputoutput/io_usb_micro.pdf?src-supplier=Arrow+Electronics, ComponentLink5Description=https://cdn.amphenol-icc.com/media/wysiwyg/files/documentation/datasheet/inputoutput/io_usb_micro.pdf?src-supplier=Onlinecomponents.com, ComponentLink5URL=https://cdn.amphenol-icc.com/media/wysiwyg/files/documentation/datasheet/inputoutput/io_usb_micro.pdf?src-supplier=Onlinecomponents.com, ComponentLink6Description=https://cdn.amphenol-icc.com/media/wysiwyg/files/documentation/datasheet/inputoutput/io_usb_micro.pdf?src-supplier=Verical, ComponentLink6URL=https://cdn.amphenol-icc.com/media/wysiwyg/files/documentation/datasheet/inputoutput/io_usb_micro.pdf?src-supplier=Verical, ComponentLink7Description=http://www.amphenol-icc.com/media/wysiwyg/files/drawing/10118193.pdf?src-supplier=Digi-Key, ComponentLink7URL=http://www.amphenol-icc.com/media/wysiwyg/files/drawing/10118193.pdf?src-supplier=Digi-Key, ComponentLink8Description=https://cdn.amphenol-icc.com/media/wysiwyg/files/documentation/datasheet/inputoutput/io_usb_micro.pdf?src-supplier=Digi-Key, ComponentLink8URL=https://cdn.amphenol-icc.com/media/wysiwyg/files/documentation/datasheet/inputoutput/io_usb_micro.pdf?src-supplier=Digi-Key, ComponentLink9Description=https://cdn.amphenol-icc.com/media/wysiwyg/files/documentation/datasheet/inputoutput/io_usb_micro.pdf?src-supplier=Mouser, ComponentLink9URL=https://cdn.amphenol-icc.com/media/wysiwyg/files/documentation/datasheet/inputoutput/io_usb_micro.pdf?src-supplier=Mouser, ComponentLink10Description=https://cdn.amphenol-icc.com/media/wysiwyg/files/documentation/datasheet/inputoutput/io_usb_micro.pdf?src-supplier=Allied+Electronics, ComponentLink10URL=https://cdn.amphenol-icc.com/media/wysiwyg/files/documentation/datasheet/inputoutput/io_usb_micro.pdf?src-supplier=Allied+Electronics, ComponentLink11Description=https://cdn.amphenol-icc.com/media/wysiwyg/files/documentation/datasheet/inputoutput/io_usb_micro.pdf?src-supplier=RSComponents, ComponentLink11URL=https://cdn.amphenol-icc.com/media/wysiwyg/files/documentation/datasheet/inputoutput/io_usb_micro.pdf?src-supplier=RSComponents, ComponentLink12Description=https://cdn.amphenol-icc.com/media/wysiwyg/files/documentation/datasheet/inputoutput/io_usb_micro.pdf?src-supplier=TTI, ComponentLink12URL=https://cdn.amphenol-icc.com/media/wysiwyg/files/documentation/datasheet/inputoutput/io_usb_micro.pdf?src-supplier=TTI, ComponentLink13Description=https://cdn.amphenol-icc.com/media/wysiwyg/files/documentation/datasheet/inputoutput/io_usb_micro.pdf?src-supplier=TME, ComponentLink13URL=https://cdn.amphenol-icc.com/media/wysiwyg/files/documentation/datasheet/inputoutput/io_usb_micro.pdf?src-supplier=TME, ComponentLink14Description=https://cdn.amphenol-icc.com/media/wysiwyg/files/documentation/datasheet/inputoutput/io_usb_micro.pdf?src-supplier=Heilind+Electronics, ComponentLink14URL=https://cdn.amphenol-icc.com/media/wysiwyg/files/documentation/datasheet/inputoutput/io_usb_micro.pdf?src-supplier=Heilind+Electronics, Manufacturer Part Number=10118193-0001LF, Pricing 1="1=0.48000, 10=0.42000, 25=0.38440, 50=0.36160, 100=0.34660, 250=0.31640, 500=0.30136 (USD)", RoHS=No, Stock 1=101220, Supplier 1=Digi-Key
L1: library part L1210R2R2MDWIT, "Inductor RF Chip Wirewound 2.2uH 20% 100KHz 1.13A 0.104Ohm DCR 1210 T/R", Case Code (Imperial)=1210, Case Code (Metric)=3225, Current Rating=2A, DC Current=1.13A, DC Resistance (DCR)=80mR, Inductance=2.2uH, Inductance Tolerance=20%, Manufacturer=KEMET, Max Operating Temperature=105°C, Min Operating Temperature=-40°C, Package Quantity=1000, Resistor Type=Wirewound,Ceramic, Self Resonant Frequency=190MHz, Supplier Part Number 1=399-9598-1-ND, Test Frequency=100kHz, Case/Package=1210, Category="Fixed Inductors", ComponentLink1Description=https://datasheet.ciiva.com/4957/f3115-4957838.pdf?src-supplier=Mouser, ComponentLink1URL=https://datasheet.ciiva.com/4957/f3115-4957838.pdf?src-supplier=Mouser, ComponentLink2Description=https://datasheet.ciiva.com/6691/f3115-6691487.pdf?src-supplier=Digi-Key, ComponentLink2URL=https://datasheet.ciiva.com/6691/f3115-6691487.pdf?src-supplier=Digi-Key, ComponentLink3Description=https://datasheet.ciiva.com/8512/f3115-8512543.pdf?src-supplier=Avnet, ComponentLink3URL=https://datasheet.ciiva.com/8512/f3115-8512543.pdf?src-supplier=Avnet, ComponentLink4Description=https://datasheet.ciiva.com/17280/f3115-17280270.pdf?src-supplier=Avnet+Europe, ComponentLink4URL=https://datasheet.ciiva.com/17280/f3115-17280270.pdf?src-supplier=Avnet+Europe, ComponentLink5Description=https://datasheet.ciiva.com/22685/27262-22685038.pdf?src-supplier=Element14, ComponentLink5URL=https://datasheet.ciiva.com/22685/27262-22685038.pdf?src-supplier=Element14, Core Material=Ferrite, Depth=2.7mm, Height=2.5mm, Height - Seated (Max)=0.106inch, Length=0.126inch, Manufacturer Part Number=L1210R2R2MDWIT, Max DC Current=2A, Military Standard=Not, Mount="Surface Mount", Packaging="Tape and Reel", Pricing 1="1=0.50000, 10=0.43700, 25=0.40600, 50=0.34360, 100=0.31240, 250=0.29364, 500=0.26240 (USD)", Radiation Hardening=No, REACH SVHC="No SVHC", RoHS=Yes, RoHS Compliant=Yes, Series=L-DWI, Shielding=Unshielded, Stock 1=11928, Supplier 1=Digi-Key, Termination=SMD/SMT, Tolerance=20%, Width=0.098inch
MH1 MH2: "Mounting Hole plated"
R1 R2 R5 R12 R13 R18 R22: library part RC0805FR-0710KL, "Res SMD 0805 10K 1% 0.125W T.C.100PPM", Case Code (Imperial)=0805, Case Code (Metric)=2012, Manufacturer=Yageo, Max Operating Temperature=155°C, Max Power Dissipation=125mW, Min Operating Temperature=-55°C, Package Quantity=1, Resistance=10kR, Resistance Tolerance=1%, Resistor Type="Thick Film", Supplier Part Number 1=311-10.0KCRTR-ND, Temperature Coefficient=100ppm/°C, Voltage Rating=150V, Case/Package=0805, Category="Chip SMD Resistors", Construction=Rectangular, Depth=1.25mm, Features="Moisture Resistant", Height=0.024inch, Lead Free="Lead Free", Length=2mm, Manufacturer Part Number=RC0805FR-0710KL, Military Standard=Not, Number of Terminations=2, Packaging="Tape and Reel", Power Rating=125mW, Pricing 1="5000=0.00544 (USD)", REACH SVHC=Unknown, RoHS=Yes, RoHS Compliant=Yes, Series=RC, Size Code=0805, Stock 1=1849576, Supplier 1=Digi-Key, Technology="THICK FILM", Termination=SMD/SMT, Tolerance=1%, Width=0.049inch
R3: library part RC0805JR-074K7L, "Res Thick Film 0805 4.7K Ohm 5% 0.125W(1/8W) ±100ppm/C Pad SMD T/R", Case Code (Imperial)=0805, Case Code (Metric)=2012, Manufacturer=Yageo, Max Operating Temperature=155°C, Max Power Dissipation=125mW, Min Operating Temperature=-55°C, Resistance=4.7kR, Resistance Tolerance=5%, Resistor Type="Thick Film", Temperature Coefficient=100ppm/°C, Voltage Rating=150V, Case/Package=0805, Category="Chip SMD Resistors", ComponentLink1Description=https://datasheet.ciiva.com/12667/rc0805-12667037.pdf?src-supplier=Mouser, ComponentLink1URL=https://datasheet.ciiva.com/12667/rc0805-12667037.pdf?src-supplier=Mouser, ComponentLink2Description=https://datasheet.ciiva.com/7941/442941-7941974.pdf?src-supplier=Element14, ComponentLink2URL=https://datasheet.ciiva.com/7941/442941-7941974.pdf?src-supplier=Element14, ComponentLink3Description=https://datasheet.ciiva.com/7941/442941-7941973.pdf?src-supplier=Element14, ComponentLink3URL=https://datasheet.ciiva.com/7941/442941-7941973.pdf?src-supplier=Element14, ComponentLink4Description=https://datasheet.ciiva.com/17486/rc0805-17486827.pdf?src-supplier=Future+Electronics, ComponentLink4URL=https://datasheet.ciiva.com/17486/rc0805-17486827.pdf?src-supplier=Future+Electronics, Construction=Rectangular, Contact Plating=Tin,Lead, Depth=1.25mm, Features="Moisture Resistant", Lead Free="Lead Free", Length=2mm, Manufacturer Part Number=RC0805JR-074K7L, Military Standard=Not, Number of Terminations=2, Packaging="Tape and Reel", Power Rating=125mW, Pricing 1="100=0.01400, 1000=0.01300, 2500=0.01200, 5000=0.01100, 10000=0.01000 (GBP)", Radiation Hardening=No, Reach SVHC Compliant=Yes, RoHS=Yes, RoHS Compliant=Yes, Series=RC, Size Code=0805, Stock 1=17500, Supplier 1=RSComponents, Termination=SMD/SMT, Tolerance=5%
R4: library part RC0805JR-0747KL, "Res Thick Film 0805 47K Ohm 5% 1/8W Ý100ppm/ÝC SMD Paper T/R", Case Code (Imperial)=0805, Case Code (Metric)=2012, Manufacturer=Yageo, Max Operating Temperature=155°C, Max Power Dissipation=125mW, Min Operating Temperature=-55°C, Resistance=47kR, Resistance Tolerance=5%, Resistor Type="Thick Film", Temperature Coefficient=100ppm/°C, Voltage Rating=150V, Case/Package=0805, Category="Chip SMD Resistors", ComponentLink1Description=https://datasheet.ciiva.com/7941/442941-7941967.pdf?src-supplier=Element14, ComponentLink1URL=https://datasheet.ciiva.com/7941/442941-7941967.pdf?src-supplier=Element14, ComponentLink2Description=https://datasheet.ciiva.com/17200/rc0805-17200744.pdf?src-supplier=Future+Electronics, ComponentLink2URL=https://datasheet.ciiva.com/17200/rc0805-17200744.pdf?src-supplier=Future+Electronics, Construction=Rectangular, Contact Plating=Tin,Lead, Depth=1.25mm, Features="Moisture Resistant", Lead Free="Lead Free", Length=2mm, Manufacturer Part Number=RC0805JR-0747KL, Military Standard=Not, Number of Terminations=2, Packaging="Tape and Reel", Power Rating=125mW, Pricing 1="1=0.03350 (USD)", Radiation Hardening=No, RoHS=Yes, RoHS Compliant=Yes, Series=RC, Size Code=0805, Stock 1=6, Supplier 1="Arrow Electronics", Termination=SMD/SMT, Tolerance=5%
R6 R7: library part RMCF0805JT680R, "Res Thick Film 0805 680 Ohm 5% 0.125W(1/8W) ±200ppm/C Pad SMD Automotive T/R", Case Code (Imperial)=0805, Case Code (Metric)=2012, Manufacturer="Stackpole Electronics", Max Operating Temperature=155°C, Max Power Dissipation=125mW, Min Operating Temperature=-55°C, Resistance=680R, Resistor Type="Thick Film", Supplier Part Number 1=RMCF0805JT680RCT-ND, Temperature Coefficient=200ppm/°C, Tolerance=5%, Case/Package=0805, Category="Chip SMD Resistors", ComponentLink1Description=https://datasheet.ciiva.com/15193/getdatasheetpartid-462682-15193655.pdf?src-supplier=Verical, ComponentLink1URL=https://datasheet.ciiva.com/15193/getdatasheetpartid-462682-15193655.pdf?src-supplier=Verical, Construction=Rectangular, Contact Plating=Tin,Matte, Depth=1.25mm, Features="Automotive AEC-Q200", Height=0.026inch, Lead Free="Lead Free", Length=2mm, Manufacturer Part Number=RMCF0805JT680R, Military Standard=Not, Mount="Surface Mount", Number of Terminations=2, Packaging="Tape and Reel", Pricing 1="1=0.10000, 10=0.01800, 100=0.00750, 1000=0.00337, 2500=0.00292 (USD)", Radiation Hardening=No, RoHS=Yes, RoHS Compliant=Yes, Series=RMCF, Stock 1=436918, Supplier 1=Digi-Key, Width=0.049inch